# Altium PCB Stabilizator.PcbDoc
Units mm, origin at the board's own origin, x right, y up, seen from the top; angles counter-clockwise.
Board outline 58.42 x 49.53 mm, 2 copper layers (Top Layer, Bottom Layer); 25 components, 15 nets, 73 pads, 0 vias.
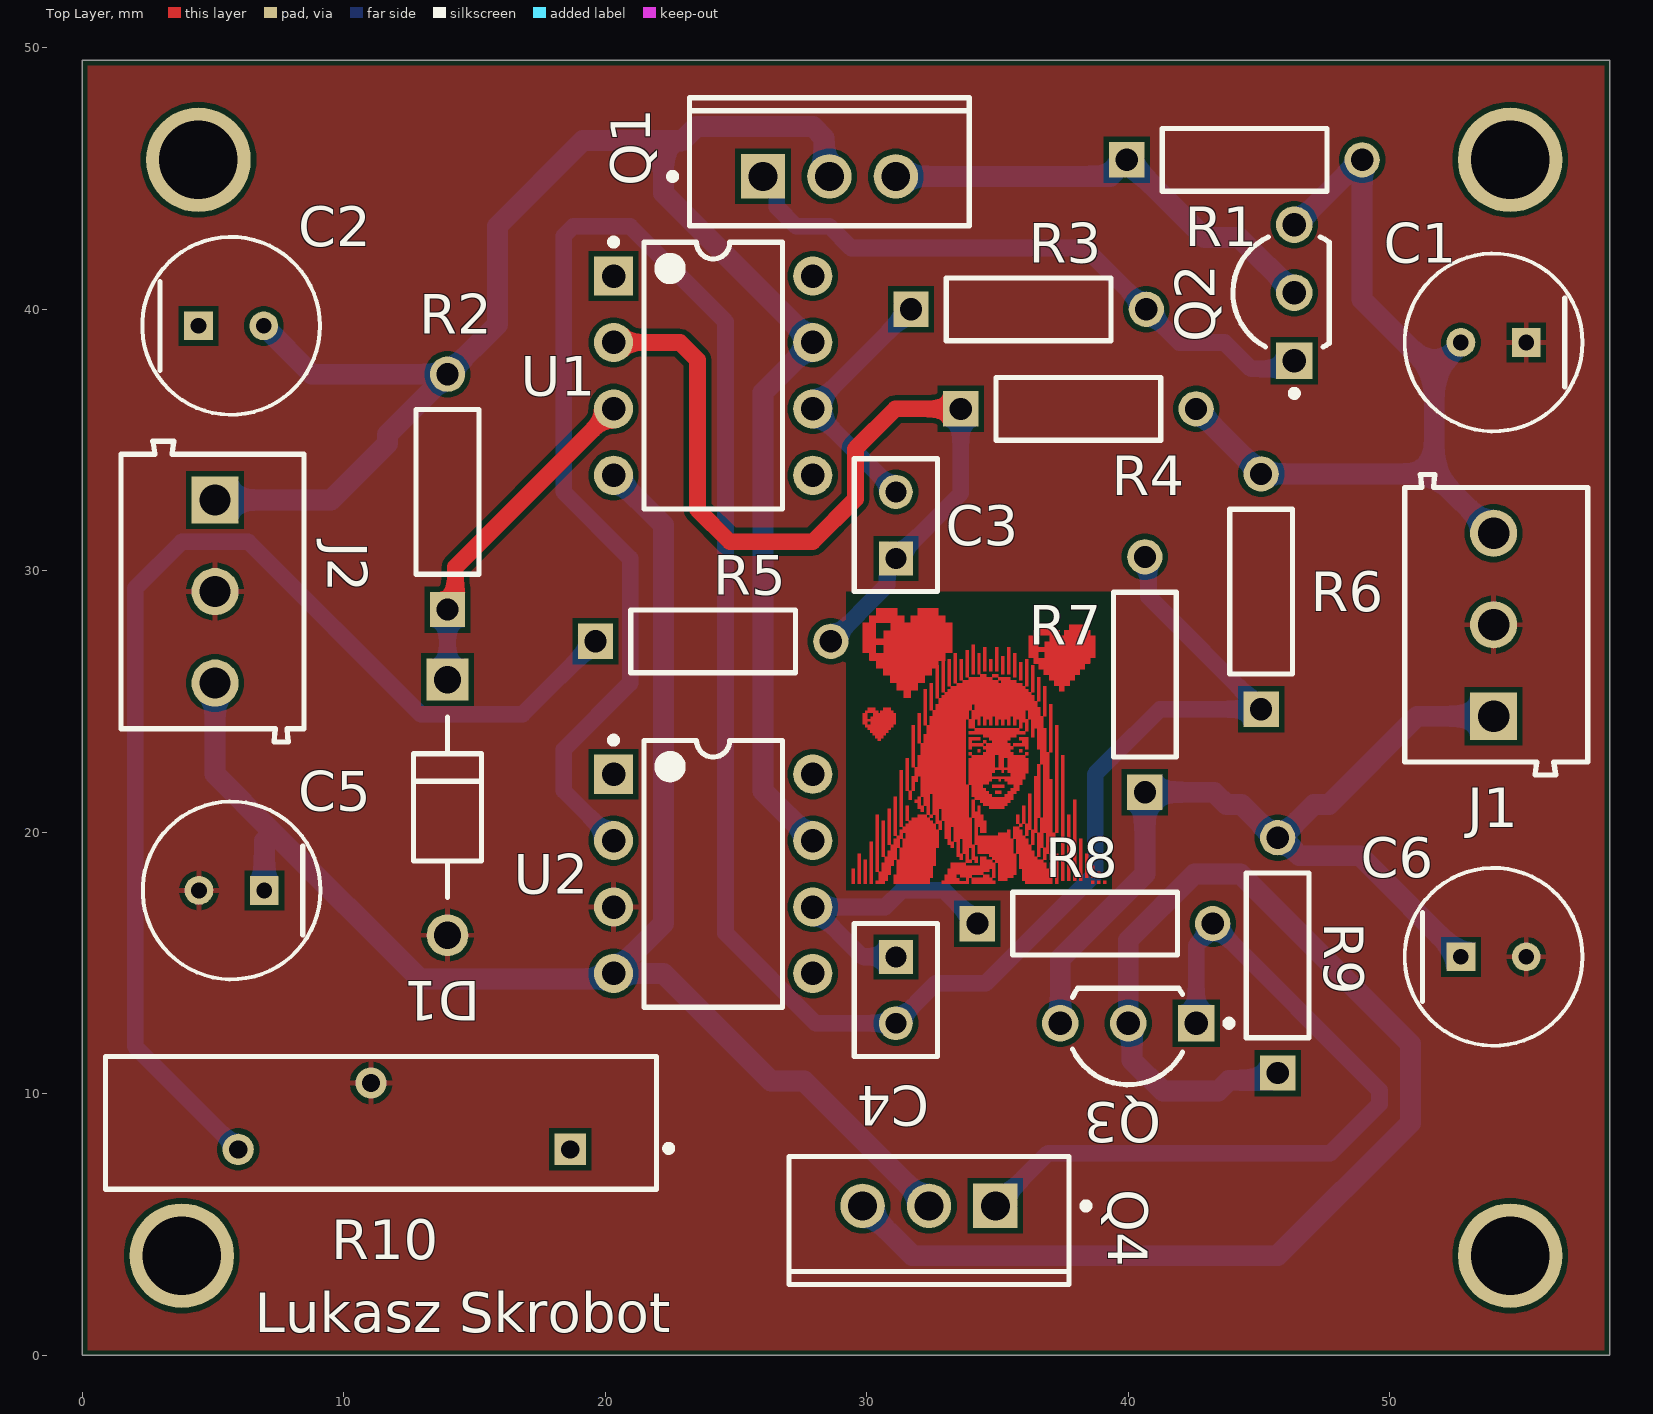
[diagram p0: Top Layer view]
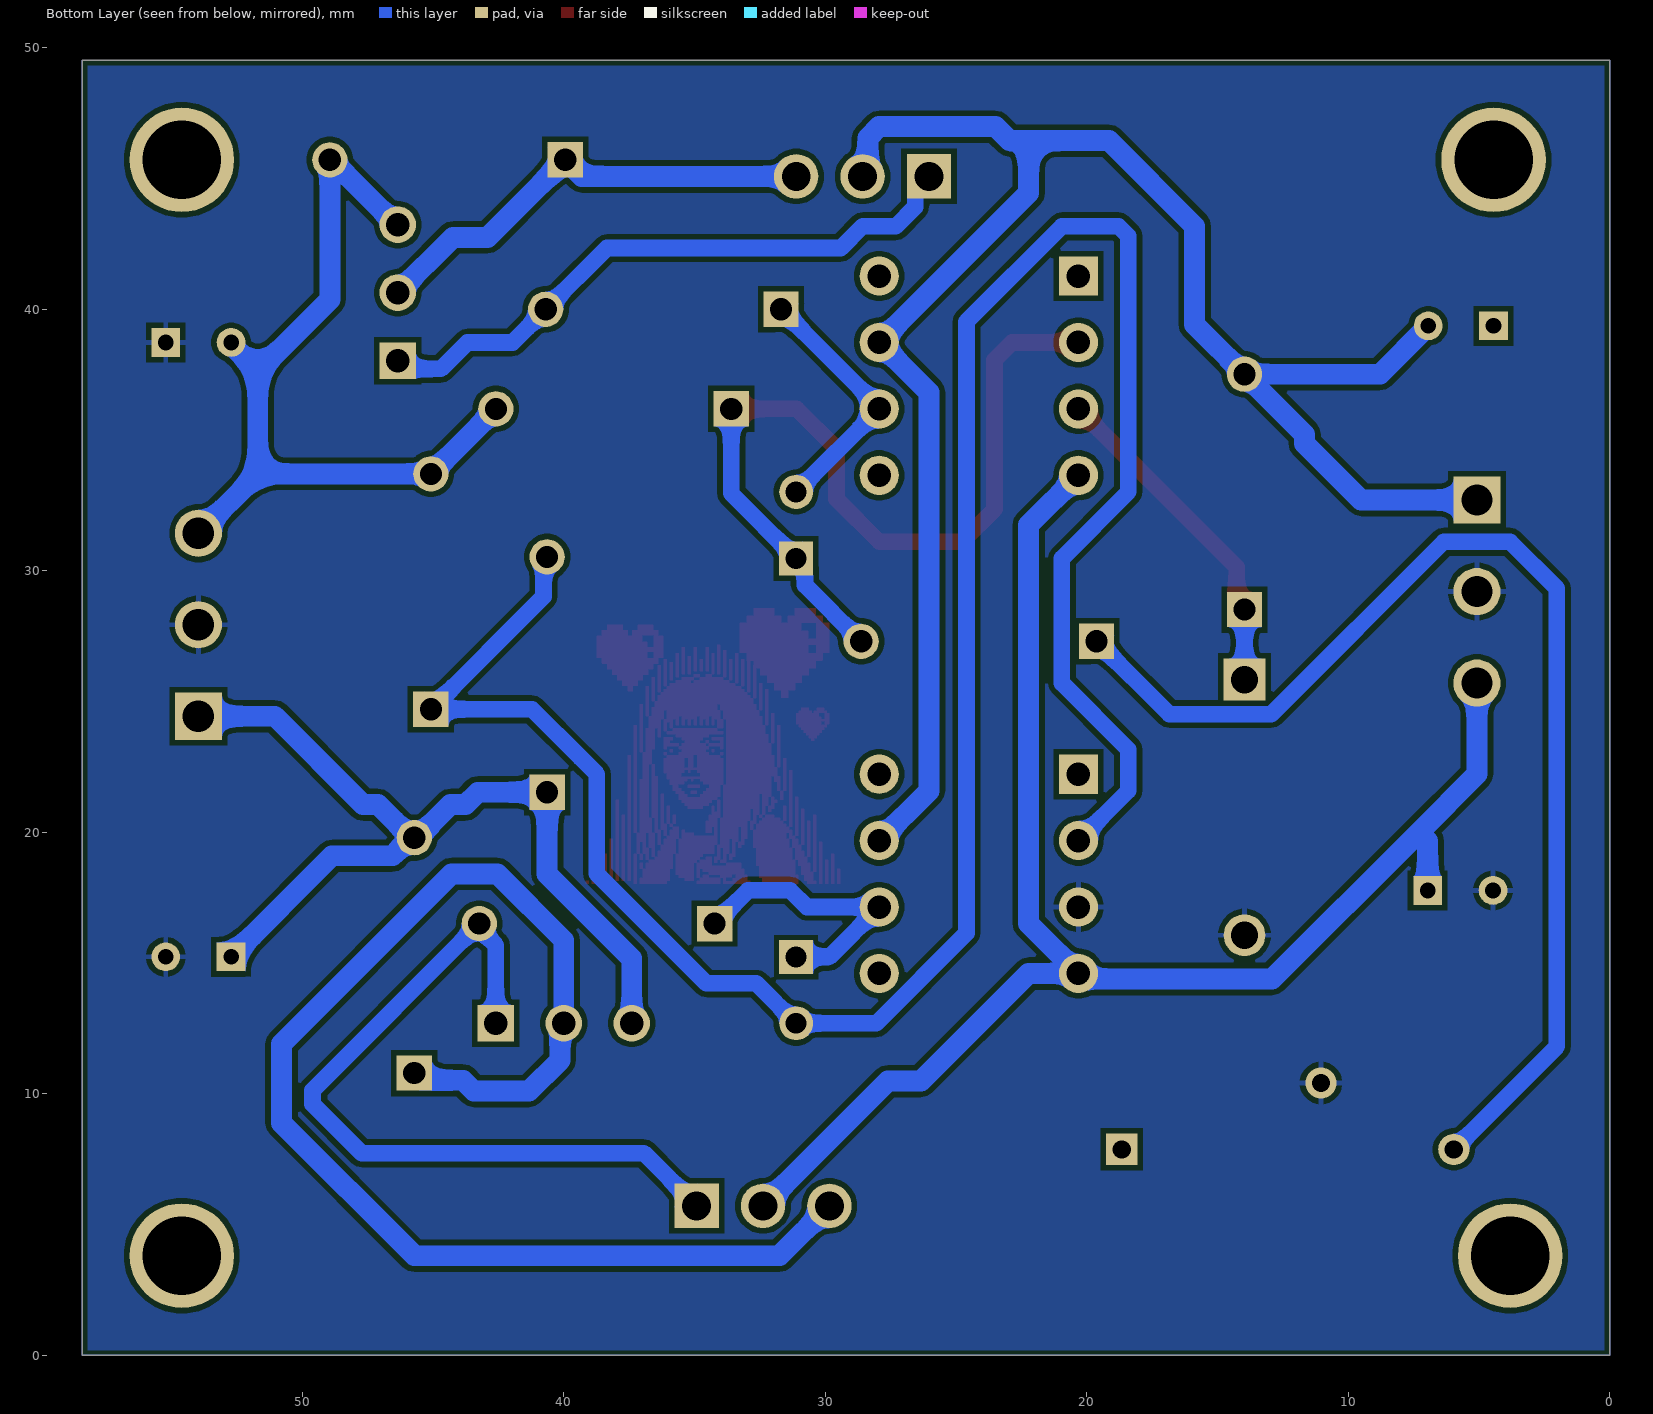
[diagram p1: Bottom Layer view, seen from below]

## Layer stack, top to bottom
Top Solder: solder mask 0.0102, Solder Resist, Dk 3.5
Top Layer: signal copper 0.0356
Dielectric 1: dielectric 0.32, FR-4, Dk 4.8
Bottom Layer: signal copper 0.0356
Bottom Solder: solder mask 0.0102, Solder Resist, Dk 3.5

## Board outline
0,0 58.42,0 58.42,49.53 0,49.53

## Design rules (kind name [scope] priority, off if disabled: settings)
BoardOutlineClearance [All] p1: gap=0.2 ignorepadtopadclearanceinfootprint=FALSE
Clearance [All] p1: gap=0.203 ignorepadtopadclearanceinfootprint=FALSE except(0.25: Arc-Hole Track-Hole SMDPad-Hole THPad-Hole Via-Hole Fill-Hole Poly-Hole Region-Hole Text-Hole)
ComponentClearance [All] p1: gap=0.127 collisioncheckmode=3 verticalgap=0.127 showdistances=TRUE
DiffPairsRouting [All] p1: maxlimit=0.381 minlimit=0.203 mostfreqgap=0.203 toplayer_minwidth=0.203 toplayer_maxwidth=25.4 toplayer_prefwidth=0.203 bottomlayer_minwidth=0.203 bottomlayer_maxwidth=25.4 bottomlayer_prefwidth=0.203 maxuncoupledlength=12.7
Height [All] p1: minheight=0 maxheight=1816.048 prefheight=12.7
HoleSize [All] p1: absolutevalues=TRUE maxlimit=6.3 minlimit=0.3 maxpercent=80.000 minpercent=20.000
HoleToHoleClearance [All] p1: gap=0.25 allowstackedmicrovias=FALSE
MinimumAnnularRing [All] p1: minimumring=0.076
MinimumSolderMaskSliver [All] p1: minsoldermaskwidth=0
PlaneClearance [All] p1: clearance=0.203
PlaneConnect PlaneConnectPowerPads [InPadClass('PowerPads')] p1: planeconnectstyle=Direct reliefexpansion=0.508 reliefentries=4 reliefconductorwidth=0.254 reliefairgap=0.254
PlaneConnect [All] p2: pad.planeconnectstyle=Relief pad.reliefexpansion=0.3 pad.reliefentries=4 pad.reliefconductorwidth=0.203 pad.reliefairgap=0.203 via.planeconnectstyle=Direct via.reliefexpansion=0.3 via.reliefentries=4 via.reliefconductorwidth=0.127 via.reliefairgap=0.127
PolygonConnect PolygonConnectPowerPads [All vs (InPadClass('PowerPads'))] p1: connectstyle=Direct reliefconductorwidth=0.254 reliefentries=4 polygonreliefangle="90 Angle" airgapwidth=0.254
PolygonConnect [All] p2: thpad.connectstyle=Relief thpad.reliefconductorwidth=0.203 thpad.reliefentries=4 thpad.polygonreliefangle="90 Angle" thpad.airgapwidth=0.203 smdpad.connectstyle=Relief smdpad.reliefconductorwidth=0.203 smdpad.reliefentries=4 smdpad.polygonreliefangle="90 Angle" smdpad.airgapwidth=0.203 via.connectstyle=Direct via.reliefconductorwidth=0.127 via.reliefentries=4 via.polygonreliefangle="90 Angle" via.airgapwidth=0.127
RoutingVias [All] p1: holewidth=0.3 width=0.6 viastyle="Through Hole" minholewidth=0.3 minwidth=0.6 maxholewidth=0.6 maxwidth=6.6
SilkToSilkClearance [All] p1: silktosilkclearance=0
SilkToSolderMaskClearance [IsPad] p1: minsilkscreentomaskgap=0.127 clearancetoexposedcopper=TRUE
SolderMaskExpansion [All] p1: expansion=0.075 istentingtop=FALSE
Width [All] p1: maxlimit=25.4 minlimit=0.635 preferedwidth=0.635 minimp=50.000000 maximp=50.000000 favimp=50.000000
20 further rules are at their usual default settings.

## Components (designator, comment, footprint, x,y, rotation, side; value= is the part's Value field where it differs from the comment)
C1 "25ZLG47MEFC6.3X7" FP-ZLG6_3X7-MFG 53.975,38.735 r180 top value=47uF
C2 "25ZLG47MEFC6.3X7" FP-ZLG6_3X7-MFG 5.695,39.37 r0 top value=47uF
C3 "C320C104K5R5TA" CAPR51-254-508X318X736 31.115,31.75 r90 top
C4 "C320C104K5R5TA" CAPR51-254-508X318X736 31.115,13.97 r270 top
C5 "25ZLG47MEFC6.3X7" FP-ZLG6_3X7-MFG 5.715,17.78 r180 top value=47uF
C6 "25ZLG47MEFC6.3X7" FP-ZLG6_3X7-MFG 53.975,15.24 r0 top value=47uF
D1 "BZX85C15-TAP" FP-6_561-5001_02-4-MFG 13.97,20.955 r270 top
J1 "691103110003" 691103110003 54.075,27.94 r90 top
J2 "691103110003" 691103110003 4.98,29.21 r270 top
Q1 "MJF6388G" ONSC-TO-220-3-221D-03 28.575,45.085 r90 top
Q2 "BC547CZL1G" ONSC-TO-92-3-29-11_AM_BL 46.355,40.64 r90 top
Q3 "BC327-40ZL1G" ONSC-TO-92-3-29-11_AM_BL 40.005,12.7 r180 top
Q4 "MJF6668" ONSC-TO-220-3-221D-03 32.385,5.715 r270 top
R1 "MFR-25FBF52-47K5" RESA60-630X240 44.45,45.72 r0 top
R2 "MFR-25FBF52-47K5" RESA60-630X240 13.97,33.02 r90 top
R3 "MFR-25FBF52-47K5" RESA60-630X240 36.195,40.005 r0 top
R4 "MFR-25FBF52-47K5" RESA60-630X240 38.1,36.195 r0 top
R5 "MFR-25FBF52-47K5" RESA60-630X240 24.13,27.305 r0 top
R6 "MFR-25FBF52-47K5" RESA60-630X240 45.085,29.21 r90 top
R7 "MFR-25FBF52-47K5" RESA60-630X240 40.64,26.035 r90 top
R8 "MFR-25FBF52-47K5" RESA60-630X240 38.735,16.51 r0 top
R9 "MFR-25FBF52-47K5" RESA60-630X240 45.72,15.295 r90 top
R10 "3006P-1-103LF" FP-3006P-MFG 11.43,8.89 r180 top
U1 "UA741CP" P0008A 24.13,37.465 r0 top
U2 "UA741CP" P0008A 24.13,18.415 r0 top

## Footprints (in the part's own frame and the unit in brackets; to place one, negate y for a bottom-side part, rotate by r counter-clockwise, add the part's x,y. Pads: shape width x height; smd on the part's side, far side on the other; paste and mask are expansions set on the pad)
691103110003 [mm] "3,50mm - modular - blue - Horizontal wire entry - Pressure clamp - 8,4mm height - 03p"
  rect 1.8x1.8 hole 1.2: 1(-3.5,0.1)
  round 1.8 hole 1.2: 2(0,0.1) 3(3.5,0.1)
  silkscreen extent -5.75,-3.5 5.75,3.5, body extent -5.75,-3.5 5.75,3.5, height 8.45
CAPR51-254-508X318X736 [mm] "THD, 2-Leads, Body 5.08x3.18mm"
  rect 1.3x1.3 hole 0.8: 1(-1.27,0)
  round 1.3 hole 0.8: 2(1.27,0)
  silkscreen extent -2.54,-1.59 2.54,1.59, body extent -2.54,-1.59 2.54,1.59, height 7.36
FP-6_561-5001_02-4-MFG [mm]
  rect 1.6x1.6 hole 1.05 paste-1000 mask+0: 1(-4.888,0)
  round 1.6 hole 1.05 paste-1000 mask+0: 2(4.888,0)
  silkscreen extent -3.45,-1.3 3.45,1.3, body extent -5.79,-1.4 5.79,1.4, height 0.25
FP-3006P-MFG [mm]
  rect 1.2x1.2 hole 0.7 paste-1000 mask+0: 1(-7.235,1.015)
  round 1.2 hole 0.7 paste-1000 mask+0: 2(0.385,-1.525) 3(5.465,1.015)
  silkscreen extent -11.13,-2.54 10.54,2.54, body extent -10.64,-2.64 10.64,2.64, height 0.25
FP-ZLG6_3X7-MFG [mm]
  rect 1.1x1.1 hole 0.6 paste-1000 mask+0: 1(-1.25,0)
  round 1.1 hole 0.6 paste-1000 mask+0: 2(1.25,0)
  silkscreen extent -3.4,-3.4 3.4,3.4, body extent -3.5,-3.5 3.5,3.5, height 0.25
ONSC-TO-92-3-29-11_AM_BL [mm] "TO, 3-Leads, Body Dia 4.7mm, Pitch 2.6mm"
  rect 1.4x1.4 hole 0.9: 1(-2.6,0)
  round 1.4 hole 0.9: 2(0,0) 3(2.6,0)
  silkscreen extent -3.97,-1.34 2.13,2.35, body extent -2.84,-1.34 2.84,2.35, height 5.33
ONSC-TO-220-3-221D-03 [mm] "FM, 3-Leads, Body 10.65x4.9mm, Pitch 2.54mm"
  rect 1.7x1.7 hole 1.1: 1(0,2.54)
  round 1.7 hole 1.1: 2(0,0) 3(0,-2.54)
  silkscreen extent -1.89,-5.35 3.01,6.12, body extent -1.89,-5.33 3.01,5.33, height 19.55
P0008A [mm] "DIP, 8-Leads, Body 10.15x6.6mm, Pitch 2.54mm"
  rect 1.5x1.5 hole 0.9: 1(-3.81,3.81)
  round 1.5 hole 0.9: 2(-3.81,1.27) 3(-3.81,-1.27) 4(-3.81,-3.81) 5(3.81,-3.81) 6(3.81,-1.27) 7(3.81,1.27) 8(3.81,3.81)
  silkscreen extent -3.93,-5.1 2.65,5.23, body extent -3.95,-5.07 3.95,5.07, height 5.08
RESA60-630X240 [mm] "Axial Resistor, 2-Leads, Dia 2.4mm, Body Length 6.3mm"
  rect 1.35x1.35 hole 0.85: 1(-4.5,0)
  round 1.35 hole 0.85: 2(4.5,0)
  silkscreen extent -3.15,-1.2 3.15,1.2, body extent -3.15,-1.2 3.15,1.2, height 2.4

## Part data
C1 C2 C5 C6: library part CMP-35376-000005-1, "CAP ALUM 47UF 20% 25V RADIAL", Capacitance=47uF, Leakage Current=35.25uA, Manufacturer=Rubycon, Package=ZLG6.3X7, Ripple Current=480mA, Temperature="-40°C to +105°C", Temperature Range High=+105°C, Temperature Range Low=-40°C, Tolerance=20%, Voltage Rating=25V, Automotive=No, Category=Cap, ComponentLink2Description=Datasheet, ComponentLink2URL=http://www.rubycon.co.jp/en/catalog/e_pdfs/aluminum/e_ZLG.pdf, Device Class L1="Passive Components", Device Class L2=Capacitors, Device Class L3="Aluminum Electrolytic Capacitors", Digikey Description="CAP ALUM 47UF 20% 25V RADIAL", Dissipation Factor=14%, Height=8mm, Ipc Land Pattern Name=CAPRD250W60D680H800, Lead Free=Yes, Life=1000Hours, Manufacturer Part Number=25ZLG47MEFC6.3X7, Material=Aluminum, Octopart=https://octopart.com/25zlg47mefc6.3x7-rubycon-19941845, RoHS=TRUE
C3 C4: library part CMP-1664-00004-1, "Radial Leaded Multilayer Ceramic Capacitor, 0.1 uF, +/- 10%, 50 V, -55 to 125 degC, 2-Pin THD, RoHS, Tape and Reel", Case\Package=SOT-23-5, Dropout Voltage="260 mV", Max Input Voltage="8 V", Max Operating Temperature="85 degC", Max Power Dissipation="250 mW", Min Operating Temperature="-40 degC", Output Current="150 mA", Output Voltage="5 V", Package Quantity=3000, ComponentLink1Description="Manufacturer URL", ComponentLink1URL=http://www.kemet.com/, ComponentLink2Description=Datasheet, ComponentLink2URL=http://www.kemet.com/docfinder?Partnumber=C320C104K5R5TA, DatasheetVersion=Dec-15, Height="1.3 mm", Length="3 mm", Mount="Surface Mount", Outputs=1, PackageDescription="2-Pin Through Hole Device, Body 5.08 x 3.18 mm, Pitch 2.54 mm", PackageReference=CAPR51-254-508X318X736, Packaging="Tape and Reel", Pins=5, Radiation Hardening=No, RoHSCompliant=true, Width="1.8 mm"
D1: library part CMP-02541-000001-1, "DIODE ZENER 15V 1.3W DO41", Manufacturer=Vishay, Max Junction Temp=+175°C, Max Reverse Leakage Current=0.5uA, Max Zener Voltage=15.6V, Nom Zener Voltage=15V, Package=6.561-5001.02-4, Power Dissipation=1300mW, Reverse Voltage=11V, Temperature="to +175°C", Automotive=Yes, Automotive Grade="Grade 0", Category=Diode, ComponentLink2Description=Datasheet, ComponentLink2URL=http://www.vishay.com/docs/85607/bzx85.pdf, Device Class L1="Discrete Semiconductors", Device Class L2=Diodes, Device Class L3="Zener Diodes", Digikey Description="DIODE ZENER 15V 1.3W DO41", Height=2.6mm, Lead Free=Yes, Manufacturer Part Number=BZX85C15-TAP, Mouser Description="Zener Diodes 15 Volt 1.3 Watt 5%", Octopart=https://octopart.com/bzx85c15-tap-vishay-55401762, RoHS=TRUE, Temperature Range High=+175°C, Zener Impedance=15Ω
J1 J2: library part CMP-1502-03255-1, "Series 1031 - 3.50 mm Horizontal Entry Modular with Pressure Clamp WR-TBL, 3 pin", Manufacturer="Wurth Elektronik", Operating Temperature=-40to105degC, Datasheet URL=http://katalog.we-online.de/em/datasheet/6911031100xx.pdf, Manufacturer URL=http://www.we-online.de, Mounting Technology=THT, Package Reference=691103110003, Packaging=Box, Part Number=691103110003, Pin Number=3, Pitch=3.50mm, Publisher=WurthElektronik
Q1: library part CMP-1046-00085-1, "Complementary Power Darlington, for Isolated Package Application, 3-Pin TO-220, Pb-Free, Tube", Manufacturer="On Semiconductor", ComponentLink1Description="Manufacturer URL", ComponentLink1URL=http://www.onsemi.com/, ComponentLink2Description=Datasheet, ComponentLink2URL=http://www.onsemi.cn/pub_link/Collateral/MJF6388-D.PDF, ComponentLink3Description="Package Specification", ComponentLink3URL=http://www.onsemi.com/pub_link/Collateral/221D-03.PDF, DatasheetVersion="Rev. 11", hFE Max=15000, IC Continuous (A)=10, Mounting Technology="Through Hole", PackageDescription="3-Pin Flange Mount, Vertical Straight Lead, Body 10.295 x 4.7 mm, Pitch 2.54 mm", PackageReference=TO-220-3-221D-03, PackageVersion="Rev. K, 02/2009", Packing=Tube, PartNumber=MJF6388G, Polarity=NPN, RoHS=TRUE
Q2: library part CMP-1048-01606-1, "Amplifier Transistor, NPN Silicon, 3-Pin TO-92, Pb-Free, Ammo Box", Manufacturer="On Semiconductor", ComponentLink1Description="Manufacturer URL", ComponentLink1URL=http://www.onsemi.com/, ComponentLink2Description=Datasheet, ComponentLink2URL=http://www.onsemi.com/pub_link/Collateral/BC546-D.PDF, ComponentLink3Description="Package Specification", ComponentLink3URL=http://www.onsemi.com/pub_link/Collateral/MAC97-D.PDF, DatasheetVersion="Rev. 7", fT Min (MHz)=150, IC Continuous (A)=0.1, Mounting Technology="Through Hole", PackageDescription="3-Pin Transistor Outline, Body 4.825 x 3.685 mm, Pitch 1.27 mm", PackageReference=TO-92-3-29-11_AM_BL, PackageVersion="Rev. AM", Packing="Ammo Box", PartNumber=BC547CZL1G, Polarity=NPN, RoHS=TRUE
Q3: library part CMP-1048-01589-1, "Amplifier Transistor, PNP Silicon, 3-Pin TO-92, Pb-Free, Ammo Box", Manufacturer="On Semiconductor", ComponentLink1Description="Manufacturer URL", ComponentLink1URL=http://www.onsemi.com/, ComponentLink2Description=Datasheet, ComponentLink2URL=http://www.onsemi.com/pub_link/Collateral/BC327-D.PDF, ComponentLink3Description="Package Specification", ComponentLink3URL=http://www.onsemi.com/pub_link/Collateral/MAC97-D.PDF, DatasheetVersion="Rev. 6", IC Continuous (A)=-0.8, Mounting Technology="Through Hole", PackageDescription="3-Pin Transistor Outline, Body 4.825 x 3.685 mm, Pitch 1.27 mm", PackageReference=TO-92-3-29-11_AM_BL, PackageVersion="Rev. AM", Packing="Ammo Box", PartNumber=BC327-40ZL1G, Polarity=PNP, RoHS=TRUE
Q4: library part CMP-1047-00150-1, "Complementary Power Darlington, for Isolated Package Application, 3-Pin TO-220, Tube", Manufacturer="On Semiconductor", ComponentLink1Description="Manufacturer URL", ComponentLink1URL=http://www.onsemi.com/, ComponentLink2Description=Datasheet, ComponentLink2URL=http://www.onsemi.com/pub_link/Collateral/MJF6388-D.PDF, ComponentLink3Description="Package Specification", ComponentLink3URL=http://www.onsemi.com/pub_link/Collateral/221D-03.PDF, DatasheetVersion="Rev. 11", hFE Max (k)=15, IC Continuous (A)=10, Mounting Technology="Through Hole", PackageDescription="3-Pin Flange Mount, Vertical Straight Lead, Body 10.295 x 4.7 mm, Pitch 2.54 mm", PackageReference=TO-220-3-221D-03, PackageVersion="Rev. K, 02/2009", Packing=Tube, PartNumber=MJF6668, Polarity=PNP, RoHS=FALSE
R1 R2 R3 R4 R5 R6 R7 R8 R9: library part CMP-1659-00063-1, "Axial Resistor, 47.5 KOhm, +/- 1%, 0.25 W, -55 to 155 degC, 2-Pin THD, RoHS, Bulk", Case Code (Metric)=2520, Case\Package=1008, Current Rating="1.3 A", Max Operating Temperature="125 degC", Min Operating Temperature="-55 degC", Package Quantity=3000, Tolerance=20%, ComponentLink1Description="Manufacturer URL", ComponentLink1URL=http://www.yageo.com/, ComponentLink2Description=Datasheet, ComponentLink2URL=http://www.yageo.com/documents/recent/Yageo%20LR_MFR_2013.pdf, DatasheetVersion=Apr-13, Height="1.2 mm", Length="2.5 mm", Mount="Surface Mount", PackageDescription="2-Pin Axial Lead, Dia 2.4 mm, Body Length 6.3 mm", PackageReference=MFR-25, Packaging="Tape and Reel", Radiation Hardening=No, RoHSCompliant=true, Shielding=Shielded, Width="2 mm"
R10: library part CMP-07234-000047-1, "TRIMMER 10KOHM 0.75W PC PIN SIDE", Color=Blue, Insulation Resistance=1GR, Manufacturer Series=3006, Max Operating Temperature=125°C, Max Power Dissipation=750mW, Min Operating Temperature=-55°C, Package Quantity=100, Resistance=10kR, Resistance Law=Linear, Resistance Tolerance=10%, Resistor Type=Cermet, Temperature Coefficient=100ppm/°C, Actuator Orientation=Horizontal, Actuator Type=SCREW, Depth=4.83mm, Height=6.35mm, Lead Free="Lead Free", Length=20.57mm, Military Standard=Not, Mount=Panel, Number of Pins=3, Number of Terminals/Pins=3, Number of Turns=15, Packaging=Rail/Tube, Pin Diameter=0.6mm, Pitch=2.5mm, Power Rating=750mW, Radiation Hardening=No, REACH SVHC="No SVHC", RoHS Compliant=Yes, Series=3006, Taper=Linear, Technology=CERMET, Terminal Finish=Tin, Termination=Pin, Thickness=5.59mm, Tolerance=10%, Type=Potentiometer, Weight=0.04oz, Width=4.83mm
U1 U2: library part CMP-0017-00973-2, "General-Purpose Operational Amplifier, 7 to 36 V, 0 to 70 degC, 8-pin DIP (P8), Pb-Free (RoHS)", Manufacturer="Texas Instruments", Total Supply Voltage(Max)(+5V is 5, +/-5V is 10)=36, Total Supply Voltage(Min)(+5V is 5, +/-5V is 10)=7, CMRR(Min)(dB)=70, Code_JEDEC=MS-001, ComponentLink1Description="Manufacturer URL", ComponentLink1URL=http://www.ti.com/, ComponentLink2Description=Datasheet, ComponentLink2URL=http://www.ti.com/lit/ds/symlink/ua741.pdf, ComponentLink3Description="Package Specification", ComponentLink3URL=http://www.ti.com/litv/pdf/mpdi001b, DatasheetVersion=SLOS094B, Eco-Plan="Pb-Free (RoHS)", GBW(Typ)(MHz)=1, IIB(Max)(pA)=800000, Iq per channel(Max)(mA)=2.8, Mounting Technology="Through Hole", Number of Channels=1, PackageDescription="8-Pin Plastic In-Line, Body 9.59 x 6.35 mm, Pitch 2.54 mm", PackageReference=P0008A, PackageVersion="4040082/E, 04/2010", PartNumber=UA741CP, Slew Rate(Typ)(V/us)=0.5, Sub Family="General Purpose Amplifier, High Supply Voltage Amplifier (>=30V)", Vio (25C)(Max)(mV)=6

## Free pads (board coordinates)
  round 4 hole 3: 2(3.81,3.81) 2(4.445,45.72) 2(54.61,3.81) 2(54.61,45.72)

## Nets (pads, with @x,y where several pads share a name; then routed paths per layer and width w, separated by ;. In a path a pad name is that pad's centre, name@x,y a point inside that pad or via, vN(x,y) a via of type N, cw(c..) or ccw(c..) an arc to the next point about the centre after c; other vN are vias at no path point)
GND: C1.1 C5.2 C6.2 D1.2 J1.2 J2.2 R10.2 U2.3
NetC1_2: C1.2 J1.3 Q2.3 R1.2 R4.2 R6.2 | length 31.6
  Bottom Layer w0.8: R4.2 R6.2 51.705,33.71 ; Q2.3 46.413,43.24 48.893,45.72 R1.2 48.95,40.385 51.705,37.63 ; C1.2 52.725,38.65 51.705,37.63 ; J1.3 51.705,33.71 ; 51.705,33.71 51.705,37.63
NetC2_2: C2.2 J2.1 Q1.2 R2.2 U1.7 U2.7 | length 71.6
  Bottom Layer w0.8: J2.1 9.509,32.71 11.671,34.872 11.671,35.221 R2.2@13.796,37.346 ; C2.2 8.795,37.52 R2.2 15.875,39.425 15.875,43.18 19.151,46.456 22.225,46.456 ; U2.7 26.035,21.59 26.035,36.83 U1.7 22.225,44.45 22.225,46.456 ; Q1.2 28.371,45.289 28.371,46.559 27.94,46.99 23.495,46.99 22.961,46.456 22.225,46.456
NetC3_1: C3.1 R4.1 R5.2 U1.2 | length 34
  Top Layer w0.635: U1.2 22.86,38.735 23.53,38.065 23.53,32.35 24.765,31.115 27.94,31.115 29.574,32.749 29.574,34.673 31.095,36.195 R4.1
  Bottom Layer w0.635: R5.2 30.782,29.457 30.782,30.147 C3.1 33.6,32.965 R4.1
NetC3_2: C3.2 R3.1 U1.6 | length 9.9
  Bottom Layer w0.635: C3.2 U1.6 27.94,36.25 R3.1
NetC4_1: C4.1 R8.1 U2.6 | length 11
  Bottom Layer w0.635: C4.1 29.845,15.24 U2.6 30.708,17.145 31.343,17.78 32.965,17.78 R8.1
NetC4_2: C4.2 R6.1 R7.2 U2.2 | length 94
  Bottom Layer w0.635: U2.2 18.415,21.59 18.415,23.17 20.955,25.71 20.955,30.48 18.415,33.02 18.415,42.808 18.787,43.18 20.955,43.18 24.603,39.532 24.603,16.145 28.048,12.7 C4.2 32.638,14.223 34.543,14.223 38.735,18.415 38.735,22.23 39.365,22.86 39.37,22.86 41.22,24.71 R6.1 40.777,29.018 40.777,30.398 R7.2
NetC5_1: C5.1 J2.3 Q4.2 U1.4 U2.4 | length 60.7
  Bottom Layer w0.8: J2.3 5.08,22.225 7.302,20.002 ; C5.1 6.965,19.665 7.302,20.002 ; U2.4@20.32,14.393 12.912,14.393 7.302,20.002 ; U1.4 22.225,31.75 22.225,16.51 U2.4 22.225,14.605 26.342,10.488 27.612,10.488 Q4.2
NetC6_1: C6.1 J1.1 Q3.3 R7.1 R9.2 | length 34.9
  Bottom Layer w0.8: Q3.3 37.405,15.18 40.64,18.415 R7.1 43.29,21.535 43.766,21.059 44.332,21.059 45.596,19.795 45.869,19.795 46.559,19.105 48.86,19.105 C6.1 ; R9.2@45.844,19.795 47.108,21.059 47.674,21.059 51.055,24.44 J1.1
NetD1_1: D1.1 R2.1 U1.3 | length 13
  Top Layer w0.635: R2.1 14.272,28.822 14.272,30.147 U1.3
  Bottom Layer w0.635: D1.1 R2.1
NetQ1_1: Q1.1 Q2.1 R3.2 | length 23.9
  Bottom Layer w0.635: Q1.1 26.568,44.552 26.568,43.917 27.305,43.18 28.575,43.18 29.408,42.347 38.353,42.347 R3.2 41.965,38.735 43.69,38.735 44.702,37.723 46.038,37.723 Q2.1
NetQ1_3: Q1.3 Q2.2 R1.1 | length 17.6
  Bottom Layer w0.8: Q1.3 39.315,45.085 R1.1 42.913,42.757 44.238,42.757 Q2.2
NetQ3_1: Q3.1 Q4.1 R8.2 | length 30.6
  Bottom Layer w0.635: Q4.1@34.392,6.061 34.739,5.715 Q4.1 36.941,7.731 47.736,7.731 49.612,9.607 49.612,10.133 R8.2 43.235,16.317 42.605,15.687 Q3.1
NetQ3_2: Q3.2 Q4.3 R9.1 | length 52.4
  Bottom Layer w0.8: Q4.3 31.75,3.81 45.72,3.81 50.8,8.89 50.8,11.906 44.291,18.415 42.545,18.415 40.005,15.875 Q3.2 40.151,12.554 40.151,11.284 41.33,10.105 43.445,10.105 43.86,10.52 45.445,10.52 R9.1
NetR5_1: R5.1 R10.3 | length 45.3
  Bottom Layer w0.635: R10.3 2.026,11.814 2.026,29.331 3.81,31.115 6.35,31.115 12.943,24.522 16.847,24.522 R5.1
pads on no net: C2.1 R10.1 U1.1 U1.5 U1.8 U2.1 U2.5 U2.8

## Polygon pours and split planes (outlines as drawn)
GND on Top Layer "GND_L01_P000" (solid, pour order 0): 0,49.53 0,0 58.42,0 58.42,49.53
GND on Bottom Layer "GND_L02_P005" (solid, pour order 5): 0,49.53 0,0 58.42,0 58.42,49.53
GND on Bottom Layer "GND_L02_P003" (solid, pour order 3): 0,49.53 0,0 58.42,0 58.42,49.53

## Other copper
Top Layer:
  region: 34.353,23.07 34.239,23.07 34.239,23.184 34.353,23.184
  region: 35.154,21.584 35.154,21.469 34.925,21.469 34.925,21.584 35.039,21.584
  region: 33.896,22.955 33.896,23.07 34.011,23.07 34.011,22.955
  region: 34.811,26.499 34.811,26.156 34.696,26.156 34.696,26.613 34.811,26.613
  region: 32.067,21.126 32.067,21.012 32.182,21.012 32.182,20.784 32.067,20.784 32.067,20.898 31.953,20.898 31.953,21.126 31.839,21.126 31.839,21.241 31.953,21.241 31.953,21.355 32.067,21.355 32.067,21.241
  region: 38.925,18.498 38.925,18.269 38.811,18.269 38.811,18.498
  region: 38.925,18.04 38.811,18.04 38.811,18.155 38.925,18.155
  region: 32.525,20.555 32.41,20.555 32.41,20.669 32.525,20.669
  region: 31.61,21.469 31.61,21.584 31.725,21.584 31.725,21.241 31.61,21.241 31.61,21.355
  region: 35.039,26.613 35.039,26.156 34.925,26.156 34.925,27.07 35.039,27.07 35.039,26.727
  region: 37.097,19.183 37.097,18.955 36.982,18.955 36.982,19.183
  region: 36.182,26.27 36.182,25.584 36.068,25.584 36.068,26.613 36.182,26.613 36.182,26.384
  region net GND: 0,0
  region: 35.496,26.27 35.496,26.041 35.382,26.041 35.382,27.07 35.496,27.07 35.496,26.384
  region: 31.953,23.755 31.953,24.555 32.067,24.555 32.067,23.412 31.953,23.412 31.953,23.641
  region: 37.782,20.555 37.782,18.155 37.668,18.155 37.668,20.669 37.782,20.669
  region: 38.011,20.555 38.011,18.155 37.897,18.155 37.897,21.241 38.011,21.241 38.011,20.669
  region: 38.24,18.155 38.125,18.155 38.125,19.755 38.24,19.755 38.24,18.269
  region: 36.754,24.441 36.754,25.584 36.868,25.584 36.868,24.441
  region: 35.954,20.898 35.954,21.012 36.068,21.012 36.068,20.326 35.954,20.326 35.954,20.784
  region: 29.896,18.955 30.01,18.955 30.01,18.04 29.896,18.04 29.896,18.84
  region: 32.41,24.784 32.41,25.698 32.525,25.698 32.525,24.67 32.41,24.67
  region: 32.182,24.555 32.182,25.47 32.296,25.47 32.296,24.098 32.182,24.098 32.182,24.441
  region: 41.212,21.469 40.869,21.355
  region: 30.696,20.441 30.696,19.069 30.582,19.069 30.582,20.441
  region: 38.354,18.726 38.354,19.183 38.468,19.183 38.468,18.269 38.354,18.269 38.354,18.612
  region: 39.04,18.155 39.154,18.155 39.154,18.04 39.04,18.04
  region: 35.954,23.07 35.839,23.07 35.839,23.184 35.954,23.184
  region: 29.553,18.04 29.439,18.04 29.439,18.612 29.553,18.612 29.553,18.155
  region: 37.325,21.584 37.325,19.983 37.211,19.983 37.211,24.098 37.325,24.098 37.325,21.698
  region: 34.582,23.412 34.468,23.412 34.468,23.527 34.582,23.527
  region: 34.582,18.955 34.811,18.955 34.811,18.84 34.925,18.84 34.925,18.269 34.811,18.269 34.811,18.612 34.696,18.612 34.696,18.498 34.468,18.498 34.468,18.383 34.011,18.383 34.011,18.269 33.896,18.269 33.896,18.04 32.868,18.04 32.868,18.155 32.982,18.155 32.982,18.383 33.096,18.383 33.096,18.612 33.21,18.612 33.21,18.726 33.21,18.84 33.782,18.84 33.782,18.726 34.353,18.726 34.353,19.069 34.582,19.069 hole: 33.553,18.383 33.439,18.383 33.439,18.269 33.553,18.269 33.553,18.155 33.782,18.155 33.782,18.269 33.553,18.269
  region: 31.496,22.384 31.496,22.841 31.61,22.841 31.61,21.584 31.496,21.584 31.496,22.269
  region: 33.439,26.841 33.439,25.698 33.325,25.698 33.325,26.841
  region: 36.982,24.784 36.982,24.898 37.097,24.898 37.097,23.07 36.982,23.07 36.982,24.67
  region: 36.182,23.298 36.182,23.184 36.068,23.184 36.068,23.298 35.611,23.298 35.611,23.412 35.954,23.412 35.954,23.527 35.839,23.527 35.839,23.641 36.182,23.641 36.182,23.412
  region: 34.582,26.384 34.582,26.156 34.468,26.156 34.468,27.07 34.582,27.07 34.582,26.499
  region: 35.725,20.326 35.725,20.669 35.839,20.669 35.839,20.326 35.954,20.326 35.954,20.212 35.839,20.212 35.839,20.326
  region: 34.011,26.156 34.011,27.184 34.125,27.184 34.125,26.041 34.011,26.041
  region: 38.583,18.155 38.697,18.155 38.697,18.04 38.583,18.04
  region: 31.153,21.241 31.153,19.869 31.039,19.869 31.039,21.355 31.153,21.355
  region: 37.325,18.84 37.325,18.04 37.211,18.04 37.211,19.183 37.325,19.183 37.325,18.955
  region: 36.182,23.07 36.182,22.955 36.068,22.955 36.068,23.07
  region: 33.096,26.613 33.21,26.613 33.21,25.584 33.096,25.584 33.096,26.499
  region: 35.839,23.87 36.068,23.87 36.068,23.755 35.725,23.755 35.725,23.641 35.496,23.641 35.496,23.527 35.382,23.527 35.382,23.412 35.496,23.412 35.496,23.298 35.611,23.298 35.611,23.184 35.496,23.184 35.496,23.07 35.611,23.07 35.611,22.955 36.068,22.955 36.068,22.841 36.182,22.841 36.182,22.269 36.068,22.269 36.068,22.041 35.954,22.041 35.954,21.812 35.839,21.812 35.839,21.584 35.725,21.584 35.725,21.469 35.611,21.469 35.611,21.355 35.611,21.241 35.496,21.241 35.496,21.126 35.382,21.126 35.382,21.012 35.268,21.012 35.268,20.898 34.696,20.898 34.696,21.012 34.468,21.012 34.468,21.126 34.353,21.126 34.353,21.241 34.125,21.241 34.125,21.355 34.011,21.355 34.011,21.812 33.896,21.812 33.896,22.841 34.011,22.841 34.011,22.955 34.468,22.955 34.468,23.07 34.582,23.07 34.582,23.184 34.468,23.184 34.468,23.298 34.582,23.298 34.582,23.412 34.811,23.412 34.811,23.527 34.696,23.527 34.696,23.641 34.468,23.641 34.468,23.755 33.896,23.755 33.896,23.87 34.125,23.87 34.125,23.984 35.839,23.984 hole: 35.039,22.955 34.925,22.955 34.925,22.498 35.039,22.498 35.039,22.612 35.039,22.727 hole: 35.382,22.384 35.268,22.384 35.268,22.269 35.154,22.269 35.154,22.384 34.925,22.384 34.925,22.269 34.811,22.269 34.811,22.155 35.496,22.155 35.496,22.269 35.382,22.269 hole: 35.268,22.041 35.154,22.041 35.154,21.927 35.039,21.927 35.039,22.041 34.811,22.041 34.811,21.927 34.696,21.927 34.696,21.812 34.468,21.812 34.468,21.698 34.582,21.698 34.582,21.584 34.696,21.584 34.696,21.469 34.811,21.469 34.811,21.355 35.268,21.355 35.268,21.469 35.382,21.469 35.382,21.584 35.496,21.584 35.496,21.698 35.611,21.698 35.611,21.812 35.382,21.812 35.382,21.927 35.268,21.927 hole: 35.382,22.841 35.268,22.841 35.268,22.498 35.382,22.498
  region: 33.782,25.927 33.782,26.956 33.896,26.956 33.896,25.927
  region: 30.81,20.555 30.81,20.898 30.924,20.898 30.924,19.526 30.81,19.526 30.81,20.441
  region: 35.268,26.727 35.268,26.041 35.154,26.041 35.154,26.727
  region: 30.353,20.212 30.353,20.669 30.467,20.669 30.467,18.498 30.353,18.498 30.353,20.098
  region: 31.496,20.441 31.496,21.012 31.61,21.012 31.61,20.441 31.725,20.441 31.725,20.555 31.953,20.555 31.953,20.669 32.296,20.669 32.296,20.555 32.41,20.555 32.41,20.441 32.525,20.441 32.525,20.326 32.639,20.326 32.639,20.098 32.753,20.098 32.753,19.412 32.639,19.412 32.639,18.726 32.525,18.726 32.525,18.269 32.41,18.269 32.41,18.04 31.039,18.04 31.039,18.383 31.153,18.383 31.153,18.955 31.267,18.955 31.267,19.412 31.382,19.412 31.382,19.755 31.496,19.755 31.496,19.983 31.382,19.983 31.382,19.755 31.267,19.755 31.267,19.412 31.153,19.412 31.153,18.955 31.039,18.955 31.039,18.726 30.924,18.726 30.924,18.383 30.81,18.383 30.81,18.155 30.696,18.155 30.696,18.04 30.353,18.04 30.353,18.155 30.467,18.155 30.467,18.498 30.582,18.498 30.582,18.84 30.696,18.84 30.696,19.069 30.81,19.069 30.81,19.298 30.924,19.298 30.924,19.526 31.039,19.526 31.039,19.755 31.153,19.755 31.153,19.869 31.267,19.869 31.267,20.098 31.382,20.098 31.382,20.212 31.496,20.212 31.496,20.326 31.61,20.326 31.61,20.441
  region: 38.697,18.383 38.697,18.269 38.583,18.269 38.583,18.726 38.697,18.726 38.697,18.498
  region: 35.039,18.155 35.039,18.84 34.925,18.84 34.925,18.955 34.811,18.955 34.811,19.069 34.696,19.069 34.696,19.183 34.239,19.183 34.239,19.526 34.125,19.526 34.125,20.555 34.011,20.555 34.011,21.241 34.125,21.241 34.125,20.784 34.239,20.784 34.239,21.012 34.353,21.012 34.353,20.669 34.468,20.669 34.468,20.441 34.582,20.441 34.582,19.983 34.353,19.983 34.353,20.212 34.239,20.212 34.239,19.869 35.039,19.869 35.039,19.983 35.382,19.983 35.382,20.098 35.496,20.098 35.496,19.755 35.611,19.755 35.611,19.183 35.725,19.183 35.725,18.383 35.611,18.383 35.611,18.269 35.382,18.269 35.382,18.155 35.154,18.155
  region: 37.097,18.84 37.097,18.612 36.982,18.612 36.982,18.84
  region: 31.839,22.727 31.839,22.498 31.725,22.498 31.725,24.098 31.839,24.098 31.839,22.841
  region: 30.124,18.269 30.124,19.641 30.239,19.641 30.239,18.04 30.124,18.04 30.124,18.155
  region: 34.125,23.412 34.468,23.412 34.468,23.298 34.011,23.298 34.011,23.184 33.896,23.184 33.896,23.641 34.353,23.641 34.353,23.527 34.011,23.527 34.011,23.412
  region: 36.525,25.127 36.525,25.927 36.639,25.927 36.639,25.013 36.525,25.013
  region: 35.954,25.927 35.954,25.813 35.839,25.813 35.839,26.499 35.954,26.499 35.954,26.041
  region: 34.239,26.727 34.239,26.841 34.353,26.841 34.353,26.041 34.239,26.041 34.239,26.613
  region: 34.811,26.041 35.039,26.041 35.039,25.927 34.811,25.927
  region: 37.44,21.469 37.44,22.955 37.554,22.955 37.554,18.155 37.44,18.155 37.44,21.355
  region: 29.667,19.069 29.667,19.183 29.781,19.183 29.781,18.04 29.667,18.04 29.667,18.955
  region: 31.267,21.126 31.267,22.384 31.382,22.384 31.382,20.212 31.267,20.212 31.267,21.012
  region: 32.868,25.356 32.868,26.613 32.982,26.613 32.982,25.356
  region: 34.582,18.04 34.011,18.04 34.011,18.269 34.468,18.269 34.468,18.383 34.696,18.383 34.696,18.269 34.811,18.269 34.811,18.155 34.925,18.155 34.925,18.04 34.696,18.04
  region: 36.297,26.156 36.297,26.384 36.411,26.384 36.411,25.356 36.297,25.356 36.297,26.041
  region: 35.725,26.499 35.725,25.927 35.611,25.927 35.611,26.841 35.725,26.841 35.725,26.613
  region: 32.639,25.584 32.639,26.384 32.753,26.384 32.753,25.127 32.639,25.127 32.639,25.47
  region: 35.839,19.183 35.725,19.183 35.725,19.755 35.611,19.755 35.611,20.212 35.839,20.212 35.839,20.098 35.954,20.098 35.954,19.869 36.068,19.869 36.068,19.755 36.182,19.755 36.182,19.526 36.297,19.526 36.297,19.298 36.411,19.298 36.411,19.069 36.525,19.069 36.525,18.955 36.754,18.955 36.754,18.84 36.868,18.84 36.868,18.612 36.982,18.612 36.982,18.269 37.097,18.269 37.097,18.04 36.068,18.04 36.068,18.155 35.954,18.155 35.954,18.612 35.839,18.612 35.839,19.069
  region: 36.182,19.983 36.182,19.869 36.068,19.869 36.068,20.326 36.182,20.326 36.182,21.469 36.297,21.469 36.297,20.098 36.182,20.098
  region: 221 vertices and 0 holes, not listed, extent 31.725,18.84 37.211,26.041
  region: 33.553,26.384 33.553,26.613 33.668,26.613 33.668,25.813 33.553,25.813 33.553,26.27
  region: 36.411,21.812 36.411,22.155 36.525,22.155 36.525,22.612 36.639,22.612 36.639,20.555 36.525,20.555 36.525,19.983 36.411,19.983 36.411,19.526 36.297,19.526 36.297,20.098 36.411,20.098 36.411,21.698
  region: 35.268,21.812 35.268,21.698 34.811,21.698 34.811,21.812 35.154,21.812
  region: 30.92,24.66 31.02,24.66 31.02,24.555 31.115,24.555 31.115,24.13 31.02,24.13 31.02,24.025 31.015,24.025 31.015,24.02 30.92,24.02 30.92,23.915 30.825,23.915 30.825,23.81 30.725,23.81 30.725,23.705 30.63,23.705 30.63,23.6 30.53,23.6 30.53,23.495 30.43,23.495 30.43,23.6 30.33,23.6 30.33,23.705 30.235,23.705 30.235,23.81 30.135,23.81 30.135,23.915 30.04,23.915 30.04,24.02 29.945,24.02 29.945,24.025 29.94,24.025 29.94,24.13 29.845,24.13 29.845,24.555 29.94,24.555 29.94,24.66 30.04,24.66 30.04,24.765 30.335,24.765 30.335,24.66 30.435,24.66 30.435,24.555 30.525,24.555 30.525,24.66 30.625,24.66 30.625,24.765 30.92,24.765 hole: 30.235,24.55 30.04,24.55 30.04,24.34 30.135,24.34 30.135,24.345 30.14,24.345 30.14,24.35 30.14,24.355 30.14,24.45 30.235,24.45 hole: 30.14,24.235 30.04,24.235 30.04,24.215 30.04,24.21 30.04,24.13 30.14,24.13
  region: 38.345,27.73 38.545,27.73 38.545,27.52 38.735,27.52 38.735,26.67 38.545,26.67 38.545,26.46 38.535,26.46 38.535,26.45 38.345,26.45 38.345,26.24 38.155,26.24 38.155,26.03 37.955,26.03 37.955,25.82 37.765,25.82 37.765,25.61 37.565,25.61 37.565,25.4 37.365,25.4 37.365,25.61 37.165,25.61 37.165,25.82 36.975,25.82 36.975,26.03 36.775,26.03 36.775,26.24 36.585,26.24 36.585,26.45 36.395,26.45 36.395,26.46 36.385,26.46 36.385,26.67 36.195,26.67 36.195,27.52 36.385,27.52 36.385,27.73 36.585,27.73 36.585,27.94 37.175,27.94 37.175,27.73 37.375,27.73 37.375,27.52 37.555,27.52 37.555,27.73 37.755,27.73 37.755,27.94 38.345,27.94 hole: 36.975,27.51 36.585,27.51 36.585,27.09 36.775,27.09 36.775,27.1 36.785,27.1 36.785,27.11 36.785,27.12 36.785,27.31 36.975,27.31 hole: 36.785,26.88 36.585,26.88 36.585,26.84 36.585,26.83 36.585,26.67 36.785,26.67
  region: 32.742,28.292 33.012,28.292 33.012,28.009 33.268,28.009 33.268,26.864 33.012,26.864 33.012,26.581 32.998,26.581 32.998,26.567 32.742,26.567 32.742,26.284 32.486,26.284 32.486,26.001 32.217,26.001 32.217,25.718 31.961,25.718 31.961,25.435 31.691,25.435 31.691,25.152 31.422,25.152 31.422,25.435 31.152,25.435 31.152,25.718 30.896,25.718 30.896,26.001 30.627,26.001 30.627,26.284 30.371,26.284 30.371,26.567 30.114,26.567 30.114,26.581 30.101,26.581 30.101,26.864 29.845,26.864 29.845,28.009 30.101,28.009 30.101,28.292 30.371,28.292 30.371,28.575 31.166,28.575 31.166,28.292 31.435,28.292 31.435,28.009 31.678,28.009 31.678,28.292 31.947,28.292 31.947,28.575 32.742,28.575 hole: 30.896,27.996 30.371,27.996 30.371,27.43 30.627,27.43 30.627,27.443 30.64,27.443 30.64,27.457 30.64,27.47 30.64,27.726 30.896,27.726 hole: 30.64,27.147 30.371,27.147 30.371,27.093 30.371,27.079 30.371,26.864 30.64,26.864
  pour cut-out: 29.21,29.21 39.37,29.21 39.37,17.78 29.21,17.78

## Silkscreen, mask and mechanical layers (free items; w line width, h text height)
Top Overlay:
  text "Lukasz Skrobot" at 6.604,0.889 h1.52